# EAGLE board Modelo 0.2 (EAGLE 8.2.2)
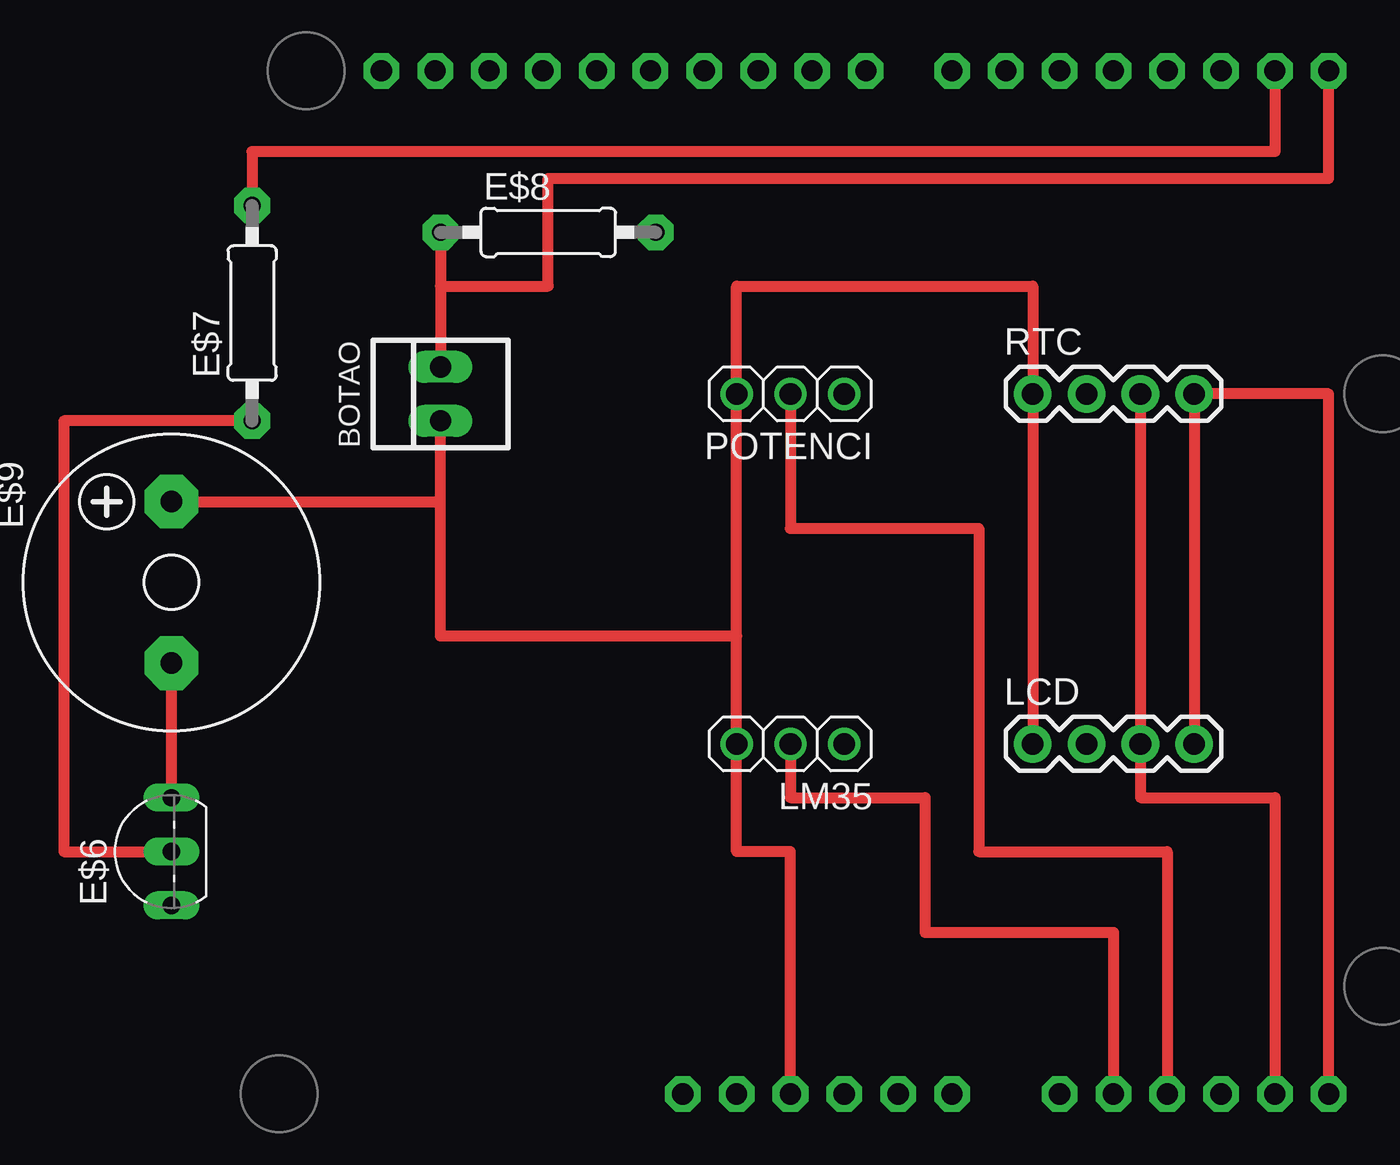
[diagram p0: board, top side]
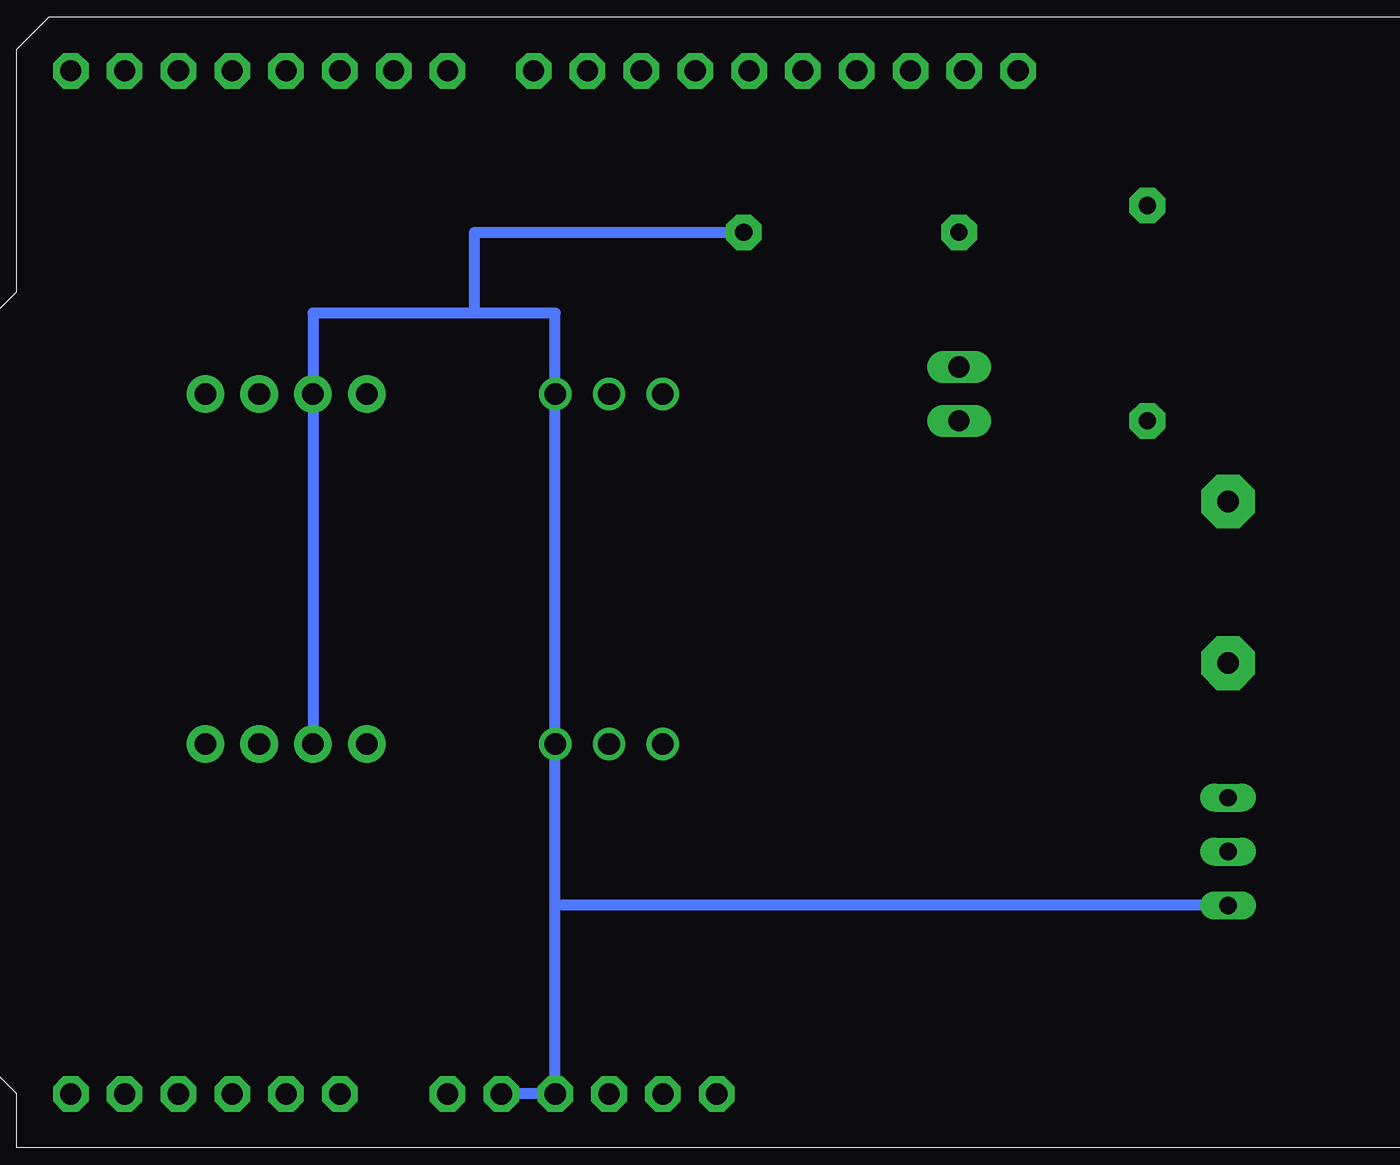
[diagram p1: board, bottom side, seen from below]

No outline drawn. Coordinates in mm, seen from the top.
Copper layers (1*16): Top 0.035mm / dielectric 1.5mm / Bottom 0.035mm
Design rules "default": minimum track width 6mil, minimum drill 0.35mm, track to track 6mil, track to pad 6mil, pad to pad 6mil, via to via 6mil, smd to smd 6mil, copper to edge 40mil, drill to drill 6mil, minimum pad ring 10mil, minimum via ring 8mil, stop-mask expansion 4mil, vias tented up to drill 0mil, thermal gap 10mil

## Footprints (pad centres in the part's own frame; a part is rotated, then mirrored left to right if it is on the bottom)
22-23-2021 = drill 1 long: 1 -1.27,0; 2 1.27,0
ARDUINOR3-NOTEXT-NOIOREF = drill 1 pad 1.676 octagon: 3V 35.56,2.54; 5V 38.1,2.54; A0 50.8,2.54; A1 53.34,2.54; A2 55.88,2.54; A3 58.42,2.54; A4 60.96,2.54; A5 63.5,2.54; AREF 23.876,50.8; D0 63.5,50.8; D1 60.96,50.8; D2 58.42,50.8; D3 55.88,50.8; D4 53.34,50.8; D5 50.8,50.8; D6 48.26,50.8; D7 45.72,50.8; D8 41.656,50.8; D9 39.116,50.8; D10 36.576,50.8; D11 34.036,50.8; D12 31.496,50.8; D13 28.956,50.8; GND 26.416,50.8; GND1 43.18,2.54; GND2 40.64,2.54; RESET 33.02,2.54; SCL 18.796,50.8; SDA 21.336,50.8; VIN 45.72,2.54
TO92-OVAL = drill 0.813 long: 1 -2.54,0; 2 0,0; 3 2.54,0
0207/10 = drill 0.813 pad 1.676 octagon: 1 -5.08,0; 2 5.08,0
F/CM12P = drill 1.016 pad 2.54 octagon: + 3.81,0; - -3.81,0
1X04-BIG = drill 1.016 pad 1.778: 1 0,0; 2 2.54,0; 3 5.08,0; 4 7.62,0
1X03 = drill 1.016: 1 -2.54,0; 2 0,0; 3 2.54,0

## Placement (x,y rotation side)
BOTAO  [22-23-2021]  29.21,40.64 90 top
E$1  [ARDUINOR3-NOTEXT-NOIOREF]  7.62,5.08 0 top
E$6  [TO92-OVAL]  16.51,19.05 90 top
E$7  [0207/10]  20.32,44.45 90 top
E$8  [0207/10]  34.29,48.26 0 top
E$9  [F/CM12P]  16.51,31.75 90 top
LCD  [1X04-BIG]  57.15,24.13 0 top
LM35  [1X03]  45.72,24.13 180 top
POTENCI  [1X03]  45.72,40.64 180 top
RTC  [1X04-BIG]  57.15,40.64 0 top

## Library data of the parts
BOTAO = con-molex
E$1 E$6-E$8 LCD LM35 POTENCI RTC = adafruit
E$9 = buzzer

## Nets
S$1: E$1.A5 LCD.4 RTC.4
S$2: E$1.A4 LCD.3 RTC.3
S$3: E$1.GND1 E$1.GND2 E$6.1 E$8.2 LCD.2 LM35.1 POTENCI.1 RTC.2
S$4: BOTAO.1 E$1.5V E$9.+ LCD.1 LM35.3 POTENCI.3 RTC.1
S$5: E$1.A2 POTENCI.2
S$6: E$1.A1 LM35.2
S$7: BOTAO.2 E$1.D0 E$8.1
S$8: E$6.3 E$9.-
S$9: E$1.D1 E$7.2
S$10: E$6.2 E$7.1

## Tracks (layer width: path | path; a pad name or v marks a point on that pad's centre or on a via)
S$1
  Top 0.508: E$1.A5 71.12,40.64 RTC.4 LCD.4
S$2
  Top 0.508: RTC.3 LCD.3 62.23,21.59 68.58,21.59 E$1.A4
S$3
  Bottom 0.508: E$1.GND1 E$1.GND2 48.26,16.51 | 48.26,16.51 LM35.1 POTENCI.1 48.26,44.45 52.07,44.45 | 52.07,44.45 59.69,44.45 RTC.2 LCD.2 | 52.07,44.45 52.07,48.26 E$8.2 | E$6.1 48.26,16.51
S$4
  Top 0.508: E$1.5V 45.72,19.05 43.18,19.05 LM35.3 43.18,29.21 | 43.18,29.21 POTENCI.3 43.18,45.72 57.15,45.72 RTC.1 LCD.1 | 43.18,29.21 29.21,29.21 29.21,35.56 | 29.21,35.56 BOTAO.1 | E$9.+ 29.21,35.56
S$5
  Top 0.508: POTENCI.2 45.72,34.29 54.61,34.29 54.61,19.05 63.5,19.05 E$1.A2
S$6
  Top 0.508: LM35.2 45.72,21.59 52.07,21.59 52.07,15.24 60.96,15.24 E$1.A1
S$7
  Top 0.508: E$8.1 29.21,45.72 | 29.21,45.72 BOTAO.2 | 29.21,45.72 34.29,45.72 34.29,50.8 71.12,50.8 E$1.D0
S$8
  Top 0.508: E$9.- E$6.3
S$9
  Top 0.508: E$1.D1 68.58,52.07 20.32,52.07 E$7.2
S$10
  Top 0.508: E$7.1 11.43,39.37 11.43,19.05 E$6.2